# EAGLE board VX2212-REV-B (EAGLE 5.11)
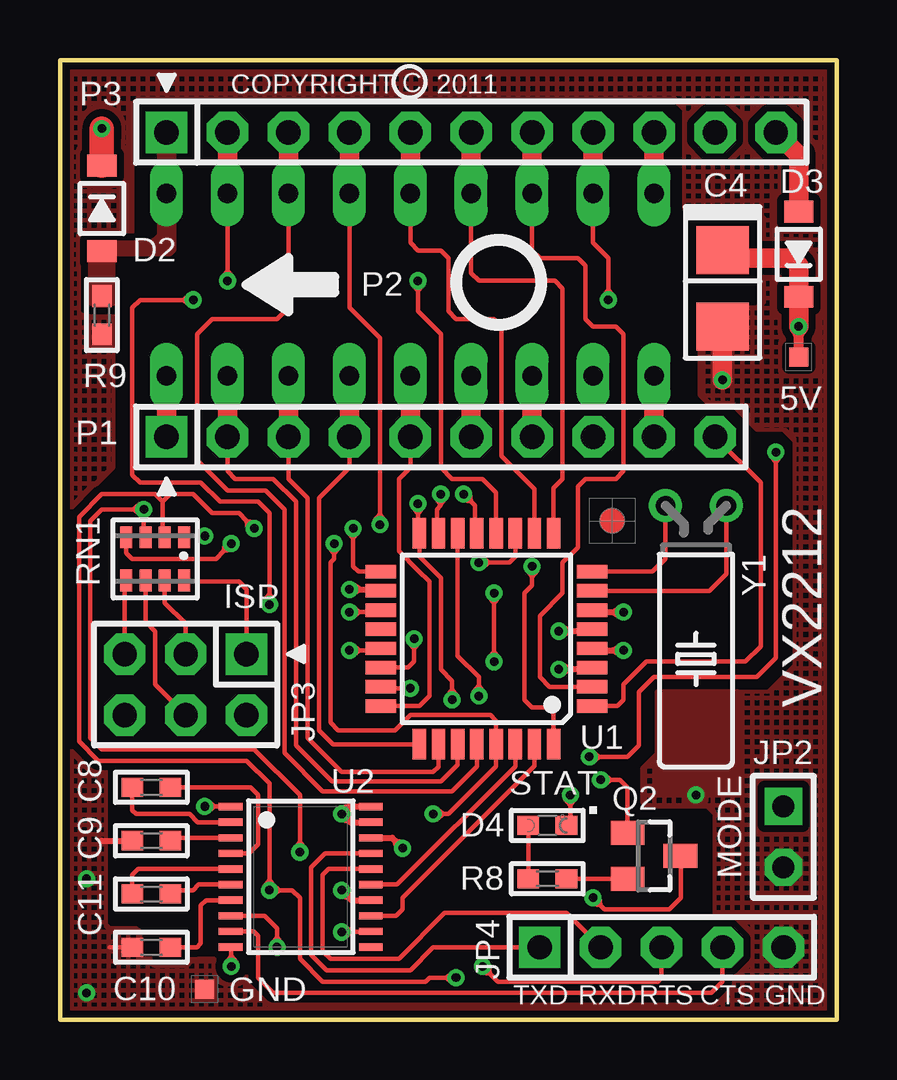
[diagram p0: board, top side]
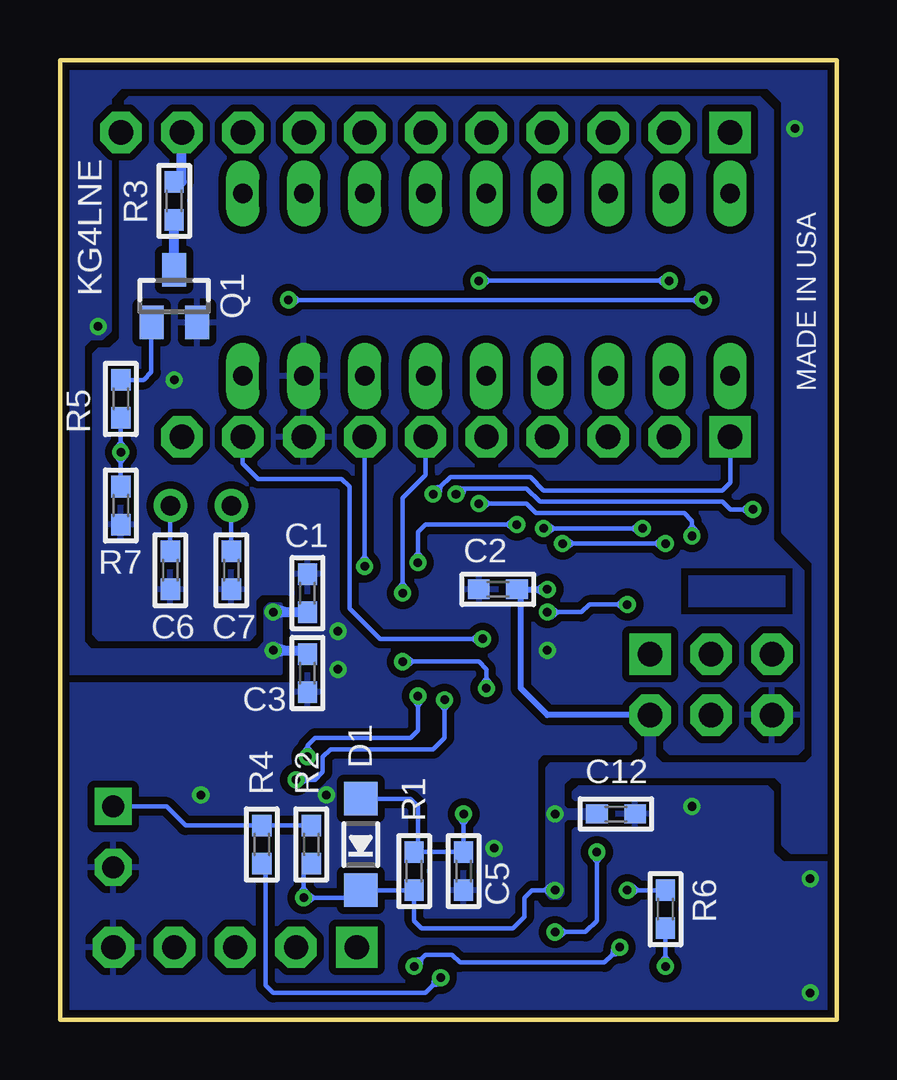
[diagram p1: board, bottom side, seen from below]

Size 32.38 x 40.01 mm. Coordinates in mm from the lower left corner, seen from the top.
Outline: 0,0 32.38,0 32.38,40.01 0,40.01 0,0
Copper layers (1*16): Top 0.035mm / dielectric 1.5mm / Bottom 0.035mm
Design rules "smd-7mil": minimum track width 7mil, minimum drill 12mil, track to track 7mil, track to pad 7mil, pad to pad 7mil, via to via 7mil, smd to smd 7mil, copper to edge 10mil, drill to drill 8mil, minimum pad ring 10mil, minimum via ring 7mil, stop-mask expansion 4mil, vias tented up to drill 24mil, thermal gap 12mil
Net classes: 1 VCC: width 0.178 mm

## Footprints (pad centres in the part's own frame; a part is rotated, then mirrored left to right if it is on the bottom)
SMD-08SN = smd 0.8 x 0.8: TP 0,0
C0603 = smd 0.9 x 0.8: 1 -0.794,0; 2 0.794,0
C3528/T = smd 2 x 2.2: + 1.587,0; - -1.587,0
SOD123 = smd 1.4 x 1.4: A 1.905,0; C -1.905,0
SOD123LF = smd 0.91 x 1.22: A 1.778,0; C -1.778,0
CHIPLED_0603 = smd 0.8 x 0.9: A 0,-0.794; C 0,0.794
JP1 = drill 0.914 square: 1 0,-1.27 | drill 0.914 octagon: 2 0,1.27
AVR-ISP-6 = drill 1.016 square: 1 -2.54,-1.27 | drill 1.016 octagon: 2 -2.54,1.27; 3 0,-1.27; 4 0,1.27; 5 2.54,-1.27; 6 2.54,1.27
1X05 = drill 1.016 square: 1 -5.08,0 | drill 1.016 octagon: 2 -2.54,0; 3 0,0; 4 2.54,0; 5 5.08,0
1X10 = drill 1.016 square: 1 -11.43,0 | drill 1.016 octagon: 2 -8.89,0; 3 -6.35,0; 4 -3.81,0; 5 -1.27,0; 6 1.27,0; 7 3.81,0; 8 6.35,0; 9 8.89,0; 10 11.43,0
DIL18-NS = drill 0.813 long: 1 -10.16,-3.81; 2 -7.62,-3.81; 3 -5.08,-3.81; 4 -2.54,-3.81; 5 0,-3.81; 6 2.54,-3.81; 7 5.08,-3.81; 8 7.62,-3.81; 9 10.16,-3.81; 10 10.16,3.81; 11 7.62,3.81; 12 5.08,3.81; 13 2.54,3.81; 14 0,3.81; 15 -2.54,3.81; 16 -5.08,3.81; 17 -7.62,3.81; 18 -10.16,3.81
1X11 = drill 1.016 square: 1 -12.7,0 | drill 1.016 octagon: 2 -10.16,0; 3 -7.62,0; 4 -5.08,0; 5 -2.54,0; 6 0,0; 7 2.54,0; 8 5.08,0; 9 7.62,0; 10 10.16,0; 11 12.7,0
SOT23-BEC = smd 1 x 1.4: B -0.95,-1.1; C 0,1.1; E 0.95,-1.1
R0603 = smd 0.9 x 0.8: 1 -0.794,0; 2 0.794,0
742-8 = smd 0.5 x 0.9: 1 -1.2,-0.9; 2 -0.4,-0.9; 3 0.4,-0.9; 4 1.2,-0.9; 5 1.2,0.9; 6 0.4,0.9; 7 -0.4,0.9; 8 -1.2,0.9
TQFP32-08 = smd 1.27 x 0.559: 1 -4.4,2.8; 2 -4.4,2; 3 -4.4,1.2; 4 -4.4,0.4; 5 -4.4,-0.4; 6 -4.4,-1.2; 7 -4.4,-2; 8 -4.4,-2.8; 17 4.4,-2.8; 18 4.4,-2; 19 4.4,-1.2; 20 4.4,-0.4; 21 4.4,0.4; 22 4.4,1.2; 23 4.4,2; 24 4.4,2.8 | smd 0.559 x 1.27: 9 -2.8,-4.4; 10 -2,-4.4; 11 -1.2,-4.4; 12 -0.4,-4.4; 13 0.4,-4.4; 14 1.2,-4.4; 15 2,-4.4; 16 2.8,-4.4; 25 2.8,4.4; 26 2,4.4; 27 1.2,4.4; 28 0.4,4.4; 29 -0.4,4.4; 30 -1.2,4.4; 31 -2,4.4; 32 -2.8,4.4
TSSOP20 = smd 0.305 x 0.991: 1 -2.925,-2.918; 2 -2.275,-2.918; 3 -1.625,-2.918; 4 -0.975,-2.918; 5 -0.325,-2.918; 6 0.325,-2.918; 7 0.975,-2.918; 8 1.625,-2.918; 9 2.275,-2.918; 10 2.925,-2.918; 11 2.925,2.918; 12 2.275,2.918; 13 1.625,2.918; 14 0.975,2.918; 15 0.325,2.918; 16 -0.325,2.918; 17 -0.975,2.918; 18 -1.625,2.918; 19 -2.275,2.918; 20 -2.925,2.918
TC39H = drill 0.813 round: 1 -1.27,0; 2 1.27,0

## Placement (x,y rotation side)
5V  TPP-SMD-08SN  [SMD-08SN]  30.8,27.62 90 top
$$U$1  [ICON_PIN1_B]  4.45,38.73 90 top
$$U$2  [ICON_PIN1_B]  4.45,22.54 270 top
$$U$3  [ICON_PIN1_B]  9.53,15.24 0 top
C1  0.1uF  [C0603]  22.07,17.78 270 bottom
C2  0.1uF  [C0603]  14.13,17.94 0 bottom
C3  0.1uF  [C0603]  22.07,14.45 270 bottom
C4  10uF/16V  [C3528/T]  27.62,30.48 90 top
C5  0.1uF  [C0603]  15.56,6.19 90 bottom
C6  22pF  [C0603]  27.78,18.73 90 bottom
C7  22pF  [C0603]  25.24,18.73 90 bottom
C8  0.1uF  [C0603]  3.81,9.68 180 top
C9  0.1uF  [C0603]  3.81,7.46 180 top
C10  0.1uF  [C0603]  3.81,3.02 180 top
C11  0.1uF  [C0603]  3.81,5.24 180 top
C12  0.1uF  [C0603]  9.21,8.57 180 bottom
D1  MMSD4148  [SOD123]  19.84,7.3 90 bottom
D2  MBR140SFT1 (DNP)  [SOD123LF]  1.75,33.81 270 top
D3  MBR140SFT1  [SOD123LF]  30.8,31.91 90 top
D4  0603  [CHIPLED_0603]  20.32,8.1 270 top
FIDUCIAL1  [G10S]  23.02,20.8 0 top
GND  TPP-SMD-08SN  [SMD-08SN]  6.03,1.27 0 top
ICON2  [ICON_ARROW-S]  9.53,30.64 90 top
JP2  [JP1]  30.16,7.62 180 top
JP3  AVR-ISP-6  [AVR-ISP-6]  5.24,13.97 180 top
JP4  [1X05]  25.08,3.02 0 top
P1  [1X10]  15.88,24.29 0 top
P2  [DIL18-NS]  14.61,30.64 0 top
P3  [1X11]  17.14,36.99 0 top
Q1  MMBT3904LT1  [SOT23-BEC]  27.62,30.16 0 bottom
Q2  MMBT3904LT1  [SOT23-BEC]  24.77,6.83 270 top
R1  10k  [R0603]  17.62,6.19 270 bottom
R2  10k  [R0603]  21.91,7.3 90 bottom
R3  47  [R0603]  27.62,34.13 90 bottom
R4  47  [R0603]  23.97,7.3 90 bottom
R5  100  [R0603]  29.84,25.88 270 bottom
R6  47 (DNP)  [R0603]  7.14,4.6 90 bottom
R7  100k  [R0603]  29.84,21.43 90 bottom
R8  470  [R0603]  20.32,5.87 0 top
R9  10k  [R0603]  1.75,29.37 90 top
RN1  47  [742-8]  3.97,19.21 180 top
U1  MEGA8-AI  [TQFP32-08]  17.78,15.88 180 top
U2  MAX3223PW  [TSSOP20]  10.04,5.96 270 top
U$1  [PCBFEAT-COPYRIGHT-032]  7.11,38.61 0 top
U$52  [PCBFEAT-REV-070]  18.29,30.73 0 top
Y1  14.7456 MHZ  [TC39H]  26.51,21.43 180 top

## Library data of the parts
5V GND = testpoint
$$U$1-$$U$3 ICON2 = dicons
C1-C12 R1-R9 = rc-master
D1-D3 = diode
D4 = led
FIDUCIAL1 = dfiducial
JP2 = jumper
JP3 U1 = atmel
JP4 P1 P3 = pinhead
P2 = ic-package
Q1 Q2 = transistor-npn
RN1 = resistor-array
U2 = maxim
U$1 U$52 = dpcb-feature
Y1 = crystal

## Nets
#CS1: P1.7 P2.7 U1.32
#CS2: P1.10 U1.1
#RECALL: P2.10 P3.9
#RESET: C5.2 D1.A R1.1 RN1.4 U1.29
#STORE: P1.9 P2.9 U1.22
#WE: P2.11 P3.8 U1.19
+5V [VCC]: 5V.TP C1.2 C2.2 C3.1 C4.+ C12.2 D1.C D2.C D3.C JP3.2 Q2.C R1.2 R2.1 U1.4 U1.6 U1.18 U2.14 U2.19 U2.20
A0: P1.6 P2.6 U1.23
A1: P1.5 P2.5 U1.24
A2: P1.4 P2.4 U1.25
A3: P1.3 P2.3 U1.26
A4: P1.2 P2.2 U1.27
A5: P2.16 P3.3 U1.28
A6: P2.17 P3.2 U1.12
A7: P1.1 P2.1 U1.13
CTS: R6.1 U2.10
D1: P2.12 P3.7 U1.2
D2: P2.13 P3.6 U1.9
D3: P2.14 P3.5 U1.10
D4: P2.15 P3.4 U1.11
GND: C1.1 C2.1 C3.2 C4.- C5.1 C6.1 C7.1 C9.2 C10.2 C12.1 D4.C GND.TP JP2.2 JP3.6 JP4.5 P1.8 P2.8 Q1.E R7.1 R9.1 U1.3 U1.5 U1.21 U2.1 U2.18
LED: Q2.B RN1.1 U1.16
MODE/CTS: R4.1 R6.2 RN1.2 U1.17
N$1: JP4.1 U2.17
N$2: JP3.1 RN1.8
N$3: C11.2 U2.5
N$4: D4.A R8.1
N$5: JP3.4 RN1.6
N$6: JP3.3 RN1.7
N$7: JP4.3 U2.8
N$8: JP4.2 U2.16
N$9: C8.2 U2.2
N$10: C10.1 U2.7
N$11: C9.1 U2.3
N$12: C8.1 U2.4
N$13: C11.1 U2.6
N$14: P3.10 R3.2
N$15 [VCC]: D2.A P2.18 P3.1 R9.2
N$16: JP4.4 U2.9
N$17: Q2.E R8.2
N$18: Q1.C R3.1
N$20: JP2.1 R2.2 R4.2
N$22: D3.A P3.11
N$23: JP3.5 RN1.5
N$26: Q1.B R5.1
N$30: C7.2 U1.8 Y1.2
N$38: C6.2 U1.7 Y1.1
RRST: R5.2 R7.2 U1.14
RTS: RN1.3 U1.15 U2.12
RXD: U1.30 U2.15
TXD: U1.31 U2.13

## Tracks (layer width: path | path; a pad name or v marks a point on that pad's centre or on a via)
#CS1  (via drill 0.36)
  Top 0.178: 19.68,18.45 19.68,18.1 19.37,17.78 19.37,13.34 19.68,13.02 20.32,13.02 20.58,12.76 U1.32 | 19.68,18.45 v19.68,18.89 | 19.68,18.45 19.9,18.73 v19.68,18.89 | 19.68,18.45 19.47,18.73 v19.68,18.89
  Top 0.813: P1.7 P2.7
  Bottom 0.178: v19.68,18.89 19.68,19.34 | 19.68,19.34 P1.7 | 19.68,19.34 19.47,19.05 v19.68,18.89 | 19.68,19.34 19.9,19.05 v19.68,18.89
#CS2
  Top 0.178: U1.1 23.23,13.07 23.5,13.34 23.5,13.97 24.45,14.92 28.57,14.92 29.21,15.56 29.21,22.38 P1.10
#RECALL
  Top 0.813: P2.10 P3.9
#RESET  (via drill 0.36)
  Top 0.178: 18.18,11.2 U1.29 18.18,12.46 17.94,12.7 14.61,12.7 13.97,12.06 11.59,12.06 11.27,12.38 11.27,14.92 11.27,19.05 11.43,19.21 11.43,19.4 | 18.18,11.2 18.1,11.11 | v11.43,19.84 11.43,19.4 | RN1.4 2.77,19.46 3.02,19.21 6.51,19.21 6.83,19.53 | 6.83,19.53 v7.14,19.84 | 18.18,11.2 18.18,10.56 16.19,8.57 16,8.57 | 16,8.57 v15.56,8.57 | 16,8.57 15.72,8.79 v15.56,8.57 | 16,8.57 15.72,8.36 v15.56,8.57 | 11.43,19.4 11.64,19.68 v11.43,19.84 | 11.43,19.4 11.22,19.68 v11.43,19.84 | 6.83,19.53 7.18,19.58 v7.14,19.84 | 6.83,19.53 6.88,19.88 v7.14,19.84
  Bottom 0.178: v7.14,19.84 7.59,19.84 | 7.59,19.84 10.99,19.84 | 10.99,19.84 v11.43,19.84 | 17.46,6.99 R1.1 17.46,7.3 17.46,8.26 17.46,8.89 17.77,9.2 D1.A | C5.2 17.46,6.99 | 17.46,6.99 | C5.2 | v15.56,8.57 15.56,8.13 | 15.56,8.13 C5.2 | 15.56,8.13 15.77,8.41 v15.56,8.57 | 15.56,8.13 15.34,8.41 v15.56,8.57 | 10.99,19.84 11.27,19.63 v11.43,19.84 | 10.99,19.84 11.27,20.06 v11.43,19.84 | 7.59,19.84 7.3,20.06 v7.14,19.84 | 7.59,19.84 7.3,19.63 v7.14,19.84
#STORE  (via drill 0.36)
  Top 0.178: U1.22 14.52,14.68 14.76,14.92 14.76,15.43 | 14.76,15.43 v14.76,15.88 | 14.76,15.43 14.98,15.71 v14.76,15.88 | 14.76,15.43 14.55,15.71 v14.76,15.88
  Top 0.813: P1.9 P2.9
  Bottom 0.178: v14.76,15.88 15.21,15.88 | 15.21,15.88 19.05,15.88 20.32,17.14 20.32,22.23 20.64,22.54 24.13,22.54 24.77,23.18 P1.9 | 15.21,15.88 14.92,16.09 v14.76,15.88 | 15.21,15.88 14.92,15.66 v14.76,15.88
#WE  (via drill 0.36)
  Top 0.178: v5.56,30 3.33,30 3.02,29.69 3.02,22.7 3.33,22.38 5.87,22.38 6.67,21.59 8.26,21.59 8.73,21.11 v8.73,17.3 | U1.19 13.27,17.07 13.18,16.99 12.51,16.99 | v12.06,16.99 12.22,16.99 12.51,16.99 | P2.11 22.23,32.38 22.86,31.75 22.86,30.45 | v22.86,30 22.86,30.45 | 22.86,30.45 22.65,30.16 v22.86,30 | 22.86,30.45 23.07,30.16 v22.86,30 | v5.56,30 5.4,29.79 5.11,30 5.4,30.22 v5.56,30 | v8.73,17.3 8.52,17.46 8.73,17.75 8.95,17.46 v8.73,17.3 | 12.51,16.99 12.22,17.2 v12.06,16.99 | 12.51,16.99 12.22,16.77 v12.06,16.99
  Top 0.813: P2.11 P3.8
  Bottom 0.178: v5.56,30 6,30 | 6,30 22.41,30 | 22.41,30 v22.86,30 | v8.73,17.3 9.18,17.3 | 9.18,17.3 10.32,17.3 10.64,16.99 11.62,16.99 | 11.62,16.99 v12.06,16.99 | 22.41,30 22.7,29.79 v22.86,30 | 22.41,30 22.7,30.22 v22.86,30 | 6,30 5.72,30.22 v5.56,30 | 6,30 5.72,29.79 v5.56,30 | 9.18,17.3 8.89,17.52 v8.73,17.3 | 9.18,17.3 8.89,17.09 v8.73,17.3 | 11.62,16.99 11.9,16.77 v12.06,16.99 | 11.62,16.99 11.9,17.2 v12.06,16.99
+5V  (via drill 0.36)
  Top 0.178: Q2.C | Q2.C | v22.23,5.08 22.54,4.77 | 22.54,4.77 22.7,4.6 25.4,4.6 25.88,5.08 Q2.C | 22.54,4.77 22.49,5.12 v22.23,5.08 | 22.54,4.77 22.19,4.82 v22.23,5.08
  Top 0.254: U1.18 13.4,17.88 13.49,17.94 12.51,17.94 | v12.06,17.94 12.51,17.94 | 12.06,8.88 12.07,8.88 | 12.07,8.88 U2.20 | 12.06,8.88 12.06,8.89 | 12.06,8.88 | 12.06,8.88 | v11.75,8.57 | v11.75,8.57 12.06,8.89 | v11.75,8.57 | v11.75,8.57 | U2.19 12.09,8.23 12.06,8.26 | v11.75,8.57 12.06,8.26 | v11.75,5.4 | v11.75,5.4 | U2.14 12.16,4.98 v11.75,5.4 | U1.4 22.38,15.4 23.05,15.4 | 23.05,15.4 v23.5,15.4 | U1.6 22.38,16.99 23.05,16.99 | 23.05,16.99 v23.5,16.99 | v11.75,5.4 11.97,5.45 12.06,5.08 11.69,5.18 v11.75,5.4 | 23.05,16.99 23.38,16.79 v23.5,16.99 | 23.05,16.99 23.38,17.18 v23.5,16.99 | 12.51,17.94 12.18,18.14 v12.06,17.94 | 12.51,17.94 12.18,17.74 v12.06,17.94 | 12.07,8.88 11.7,8.8 v11.75,8.57 | 12.07,8.88 11.97,8.52 | 11.97,8.52 11.97,8.51 v11.75,8.57 | 12.06,8.88 11.69,8.79 v11.75,8.57 | 12.06,8.88 11.97,8.52 | 11.97,8.52 | v11.75,8.57 11.97,8.52 | 12.06,8.89 11.69,8.79 v11.75,8.57 | 12.06,8.89 11.97,8.52 | v11.75,8.57 11.97,8.52 | 12.06,8.26 11.97,8.63 v11.75,8.57 | 12.06,8.26 11.69,8.35 v11.75,8.57 | 23.05,15.4 23.38,15.2 v23.5,15.4 | 23.05,15.4 23.38,15.6 v23.5,15.4
  Top 0.406: 5V.TP 30.8,28.45 | 30.8,28.45 v30.8,28.89 | 30.8,28.45 30.94,28.84 v30.8,28.89 | 30.8,28.45 30.65,28.84 v30.8,28.89
  Top 0.813: v30.8,28.89 D3.C 30.8,31.43 30.48,31.75 27.62,31.75 C4.+
  Top 1.016: D2.C 1.75,36.83 v1.75,37.15
  Bottom 0.178: 21.78,5.08 19.84,5.08 D1.C 19.2,5.39 18.89,5.4 18.57,5.4 18.26,5.4 R1.2 17.62,4.13 17.3,3.81 13.49,3.81 13.02,4.29 13.02,5.08 12.7,5.4 12.19,5.4 | 21.78,5.08 v22.23,5.08 | v22.23,5.08 22.23,5.53 | 22.23,5.53 22.23,6.35 22.07,6.51 R2.1 | v11.75,5.4 | v11.75,5.4 | v11.75,5.4 12.19,5.4 | 12.19,5.4 11.91,5.61 v11.75,5.4 | 12.19,5.4 11.91,5.18 v11.75,5.4 | 21.78,5.08 22.07,4.87 v22.23,5.08 | 21.78,5.08 22.07,5.29 v22.23,5.08 | 22.23,5.53 22.01,5.24 v22.23,5.08 | 22.23,5.53 22.44,5.24 v22.23,5.08
  Bottom 0.254: 12.51,17.94 13.18,17.94 13.18,13.81 12.06,12.7 JP3.2 | 12.51,17.94 v12.06,17.94 | 12.51,17.94 12.18,18.14 v12.06,17.94 | 12.51,17.94 12.18,17.74 v12.06,17.94
  Bottom 0.406: v23.5,16.99 23.05,16.99 | 23.05,16.99 C1.2 | 13.49,17.94 C2.2 13.18,17.94 | v23.5,15.4 22.07,15.4 | 22.07,15.4 | 22.07,15.4 C3.1 | v23.5,15.4 | 23.05,16.99 23.44,16.84 v23.5,16.99 | 23.05,16.99 23.44,17.13 v23.5,16.99 | v23.5,15.4 23.44,15.26 23.05,15.4 23.44,15.54 v23.5,15.4
  pour Bottom (isolate 0.305, no thermals): 32.07,14.45 32.07,39.69 0.32,39.69 0.32,6.99 1.75,6.98 1.9,6.98 2.22,7.3 2.22,9.84 2.54,10.16 11.11,10.16 11.43,9.84 11.43,8.89 11.27,8.73 9.68,8.73 9.68,8.41 11.27,8.41 11.43,8.26 11.43,5.56 11.43,5.24 11.59,5.08 11.91,5.08 12.06,5.24 12.06,10.48 11.91,10.64 8.25,10.64 7.94,10.95 7.94,13.18 7.62,13.18 7.62,10.95 7.3,10.64 1.27,10.64 0.95,10.95 0.95,19.05 2.22,20.32 2.22,38.26 2.86,38.89 29.84,38.89 30.32,38.42 30.32,28.73 30.64,28.42 31.11,28.42 31.43,28.1 31.43,20.48 31.43,16.03 31.43,15.72 31.11,15.4 30.8,15.4 25.24,15.4 24.13,15.4 23.81,15.72 23.81,17.14 23.65,17.3 23.18,17.3 23.18,14.45
A0  (via drill 0.36)
  Top 0.178: v18.1,14.92 18.1,15.37 | 18.1,15.37 18.1,17.34 | 18.1,17.34 v18.1,17.78 | 13.38,13.81 13.34,13.81 | U1.23 13.38,13.81 | 13.38,13.81 14.16,13.81 | 14.16,13.81 v14.61,13.81 | 18.1,17.34 18.31,17.62 v18.1,17.78 | 18.1,17.34 17.88,17.62 v18.1,17.78 | 18.1,15.37 17.88,15.08 v18.1,14.92 | 18.1,15.37 18.31,15.08 v18.1,14.92 | 14.16,13.81 14.45,13.6 v14.61,13.81 | 14.16,13.81 14.45,14.03 v14.61,13.81
  Top 0.813: P1.6 P2.6
  Bottom 0.178: v14.61,13.81 14.61,14.13 14.61,14.61 14.92,14.92 17.65,14.92 | 17.65,14.92 v18.1,14.92 | P1.6 17.14,22.7 18.1,21.75 18.1,18.23 | v18.1,17.78 18.1,18.23 | 18.1,18.23 17.88,17.94 v18.1,17.78 | 18.1,18.23 18.31,17.94 v18.1,17.78 | 17.65,14.92 17.94,14.71 v18.1,14.92 | 17.65,14.92 17.94,15.14 v18.1,14.92 | v14.61,13.81 14.39,13.97 14.61,14.26 14.82,13.97 v14.61,13.81
A1
  Top 0.178: P1.5 14.61,23.02 14.13,22.54 14.13,19.53 14.92,18.73 15.4,18.26 15.4,13.49 14.98,13.07 U1.24
  Top 0.813: P1.5 P2.5
A2
  Top 0.178: P1.4 12.06,23.02 10.79,21.75 10.79,12.06 11.38,11.47 U1.25
  Top 0.813: P1.4 P2.4
A3
  Top 0.178: P1.3 9.53,22.54 10.32,21.75 10.32,11.75 11.75,10.32 15.56,10.32 15.78,10.54 U1.26
  Top 0.813: P1.3 P2.3
A4
  Top 0.178: U1.27 16.58,10.63 15.88,9.92 11.35,9.92 9.84,11.43 9.84,21.59 8.89,22.54 7.3,22.54 6.99,22.86 P1.2
  Top 0.813: P1.2 P2.2
A5
  Top 0.178: U1.28 17.38,10.55 16.35,9.53 10.95,9.53 9.37,11.11 9.37,21.27 8.57,22.07 6.99,22.07 5.71,23.34 5.71,28.57 6.35,29.21 9.05,29.21 9.53,29.69 P2.16
  Top 0.813: P2.16 P3.3
A6  (via drill 0.36)
  Top 0.178: U1.12 18.18,21.98 17.62,22.54 16.35,22.54 15.88,23.02 15.88,28.57 14.92,29.53 14.92,30.35 | 14.92,30.35 v14.92,30.8 | v6.99,30.8 6.99,31.24 | 6.99,31.24 P2.17 | 14.92,30.35 15.14,30.64 v14.92,30.8 | 14.92,30.35 14.71,30.64 v14.92,30.8 | 6.99,31.24 6.77,30.96 v6.99,30.8 | 6.99,31.24 7.2,30.96 v6.99,30.8
  Top 0.813: P2.17 P3.2
  Bottom 0.178: v14.92,30.8 14.48,30.8 | 14.48,30.8 7.43,30.8 | 7.43,30.8 v6.99,30.8 | 14.48,30.8 14.76,30.58 v14.92,30.8 | 14.48,30.8 14.76,31.01 v14.92,30.8 | 7.43,30.8 7.14,31.01 v6.99,30.8 | 7.43,30.8 7.14,30.58 v6.99,30.8
A7  (via drill 0.36)
  Top 0.178: U1.13 17.38,20.4 17.3,20.48 17.3,21.43 17.14,21.59 | v16.83,21.91 17.14,21.59 | 17.14,21.59 17.09,21.95 v16.83,21.91 | 17.14,21.59 16.79,21.64 v16.83,21.91
  Top 0.813: P1.1 P2.1
  Bottom 0.178: P1.1 4.45,22.38 4.76,22.07 5.08,22.07 12.22,22.07 12.78,22.62 16.11,22.62 16.51,22.22 | 16.51,22.22 v16.83,21.91 | 16.51,22.22 16.56,21.87 v16.83,21.91 | 16.51,22.22 16.86,22.17 v16.83,21.91
CTS  (via drill 0.36)
  Top 0.178: U2.10 7.14,3.03 v7.14,2.22 | v7.14,2.22 6.93,2.38 7.14,2.67 7.36,2.38 v7.14,2.22
  Bottom 0.178: v7.14,2.22 | v7.14,2.22 7.14,2.67 | 7.14,2.67 R6.1 | 7.14,2.67 6.93,2.38 v7.14,2.22 | 7.14,2.67 7.36,2.38 v7.14,2.22
D1
  Top 0.178: U1.2 20.41,13.88 20,14.29 20,16.83 20.95,17.78 20.95,19.05 21.59,19.68 21.59,22.23 21.91,22.54 23.18,22.54 23.5,22.86 23.5,28.57 23.18,28.89 22.23,28.89 21.91,29.21 21.91,31.43 21.59,31.75 20,31.75 19.68,32.07 P2.12
  Top 0.813: P2.12 P3.7
D2
  Top 0.178: U1.9 20.58,22.17 20.95,22.54 20.95,30.48 20.64,30.8 17.46,30.8 17.14,31.11 P2.13
  Top 0.813: P2.13 P3.6
D3
  Top 0.178: P2.14 14.61,32.38 14.92,32.07 15.88,32.07 16.19,31.75 16.19,29.53 16.51,29.21 18.1,29.21 18.41,28.89 18.41,23.5 19.78,22.13 U1.10
  Top 0.813: P2.14 P3.5
D4  (via drill 0.36)
  Top 0.178: P2.15 12.06,29.69 13.34,28.42 13.34,21.08 | v13.34,20.64 13.34,21.08 | U1.11 18.98,19.3 18.73,19.05 17.91,19.05 | v17.46,19.05 17.91,19.05 | 13.34,21.08 13.12,20.8 v13.34,20.64 | 13.34,21.08 13.55,20.8 v13.34,20.64 | 17.91,19.05 17.62,19.26 v17.46,19.05 | 17.91,19.05 17.62,18.84 v17.46,19.05
  Top 0.813: P2.15 P3.4
  Bottom 0.178: 13.78,20.64 17.14,20.64 17.46,20.32 17.46,19.5 | 13.78,20.64 v13.34,20.64 | v17.46,19.05 17.46,19.5 | 13.78,20.64 13.49,20.85 v13.34,20.64 | 13.78,20.64 13.49,20.42 v13.34,20.64 | 17.46,19.5 17.25,19.21 v17.46,19.05 | 17.46,19.5 17.68,19.21 v17.46,19.05
GND  (via drill 0.36)
  Top 0.178: U2.1 7.13,8.88 7.14,8.89 6.48,8.89 | 6.48,8.89 v6.03,8.89 | 2.06,3.02 C10.2 | v27.62,26.67 | v27.62,26.67 | D4.C 21.27,8.26 v21.27,9.37 | v12.06,15.4 | v12.06,15.4 | U1.21 13.38,15.4 12.51,15.4 | v12.06,15.4 12.51,15.4 | 6.48,8.89 6.19,9.1 v6.03,8.89 | 6.48,8.89 6.19,8.68 v6.03,8.89 | 12.51,15.4 12.22,15.61 v12.06,15.4 | 12.51,15.4 12.22,15.19 v12.06,15.4 | v21.27,9.37 21.49,9.21 21.27,8.92 21.06,9.21 v21.27,9.37
  Top 0.254: U1.3 21.98,14.68 21.91,14.61 21.24,14.61 | 21.24,14.61 v20.8,14.61 | U1.5 21.75,16.19 21.24,16.19 | 21.24,16.19 v20.8,16.19 | U2.18 13.85,7.58 13.97,7.46 | 13.97,7.46 v14.29,7.14 | 1.75,7.46 C9.2 | 21.24,14.61 20.91,14.8 v20.8,14.61 | 21.24,14.61 20.91,14.41 v20.8,14.61 | 21.24,16.19 20.91,16.39 v20.8,16.19 | 21.24,16.19 20.91,16 v20.8,16.19 | 13.97,7.46 14.07,7.09 v14.29,7.14 | 13.97,7.46 14.34,7.37 v14.29,7.14
  Top 0.813: v27.62,26.67 C4.-
  other vias: 1.11,5.87 1.11,1.11 26.51,9.37
  pour Bottom (isolate 0.305, rank 6): 0.32,39.69 32.07,39.69 32.07,34.45 32.07,0.32 0.32,0.32
  pour Top (isolate 0.305, rank 2, no thermals, hatched): 0.32,10.32 0.32,11.27 0.32,11.27 0.64,11.27 1.43,10.48 1.91,10.48 1.91,3.97 2.06,3.81 3.17,3.81 3.33,3.65 3.33,2.54 7.94,2.54 7.94,1.75 8.73,0.95 27.31,0.95 28.1,1.75 28.1,3.17 27.3,4.29 27.31,8.57 26.99,8.89 24.45,8.89 24.29,9.05 24.29,10.48 24.92,11.11 24.92,13.65 29.53,13.65 30.64,14.76 30.64,24.13 30.16,24.61 29.05,24.61 27.94,25.72 26.99,25.72 26.67,26.04 26.67,29.69 29.05,29.69 29.37,30 29.37,33.34 29.05,33.66 26.19,33.66 26.03,33.81 26.04,37.62 26.04,37.94 25.56,38.42 3.33,38.42 3.02,38.1 3.02,32.7 2.22,31.91 2.22,23.02 0.48,21.27 0.32,21.27 0.32,39.69 31.91,39.69 32.07,39.53 32.07,0.32 0.32,0.32
  pour Top: 24.92,13.65 28.1,13.65 28.1,9.37 26.75,9.37 26.75,9.13 26.11,9.13 26.11,9.37 24.92,9.37
  pour Top: 24.92,13.65 28.1,13.65 28.1,9.37 26.75,9.37 26.75,9.13 26.11,9.13 26.11,9.37 24.92,9.37
  pour Top: 25.08,13.65 28.26,13.65 28.26,9.37 26.91,9.37 26.91,9.13 26.27,9.13 26.27,9.37 25.08,9.37
LED  (via drill 0.36)
  Top 0.178: v14.92,21.51 14.92,21.07 | 14.92,21.07 14.92,20.32 U1.16 14.98,19.31 15.88,18.41 15.88,14.61 16.35,14.13 16.35,13.78 | RN1.1 5.17,20.16 5.59,20.16 | 5.59,20.16 v6.03,20.16 | Q2.B 23.66,9.67 23.34,10 22.99,10 | v22.54,10 22.99,10 | 16.35,13.78 v16.35,13.34 | 14.92,21.07 15.14,21.35 v14.92,21.51 | 14.92,21.07 14.71,21.35 v14.92,21.51 | 5.59,20.16 5.87,19.95 v6.03,20.16 | 5.59,20.16 5.87,20.38 v6.03,20.16 | 16.35,13.78 16.14,13.49 v16.35,13.34 | 16.35,13.78 16.57,13.49 v16.35,13.34 | 22.99,10 22.7,10.21 v22.54,10 | 22.99,10 22.7,9.79 v22.54,10
  Bottom 0.178: v6.03,20.16 6.03,20.61 | 6.03,20.61 6.03,20.8 6.35,21.11 12.54,21.11 12.94,21.51 v14.92,21.51 | v16.35,13.34 16.35,12.89 | 16.35,12.89 16.35,11.75 16.83,11.27 21.11,11.27 21.43,10.95 21.43,10.32 21.75,10 22.1,10 | 22.1,10 v22.54,10 | v14.92,21.51 14.76,21.3 14.48,21.51 14.76,21.72 v14.92,21.51 | 6.03,20.61 5.82,20.32 v6.03,20.16 | 6.03,20.61 6.25,20.32 v6.03,20.16 | 16.35,12.89 16.57,13.18 v16.35,13.34 | 16.35,12.89 16.14,13.18 v16.35,13.34 | 22.1,10 22.38,9.79 v22.54,10 | 22.1,10 22.38,10.21 v22.54,10
MODE/CTS  (via drill 0.36)
  Top 0.178: 13.38,18.73 U1.17 12.44,18.68 12.22,18.89 12.22,20.03 | v12.22,20.48 12.22,20.03 | 4.36,20.08 4.29,20 4.37,20.16 RN1.2 4.29,20.11 4.29,21.59 | v8.73,5.4 8.73,5.84 | 8.73,5.84 8.73,9.84 7.78,10.79 1.59,10.79 0.79,11.59 0.79,20.95 1.75,21.91 3.97,21.91 4.29,21.59 | 7.78,20.79 7.46,21.11 6.35,21.11 5.56,21.91 4.6,21.91 4.29,21.59 | 7.78,20.79 v8.1,20.48 | v8.1,20.48 | v8.73,5.4 9.18,5.4 | 9.18,5.4 9.68,5.4 10,5.08 10,2.54 10.95,1.59 15.24,1.59 15.4,1.75 16.07,1.75 | 16.07,1.75 v16.51,1.75 | 8.73,5.84 8.52,5.56 v8.73,5.4 | 8.73,5.84 8.95,5.56 v8.73,5.4 | 9.18,5.4 8.89,5.61 v8.73,5.4 | 9.18,5.4 8.89,5.18 v8.73,5.4 | 12.22,20.03 12.44,20.32 v12.22,20.48 | 12.22,20.03 12.01,20.32 v12.22,20.48 | 7.78,20.79 7.83,20.44 v8.1,20.48 | 7.78,20.79 8.13,20.74 v8.1,20.48 | 16.07,1.75 16.35,1.53 v16.51,1.75 | 16.07,1.75 16.35,1.96 v16.51,1.75
  Bottom 0.178: v8.1,20.48 8.54,20.48 | 8.54,20.48 11.78,20.48 | 11.78,20.48 v12.22,20.48 | R4.1 23.81,6.35 23.81,1.43 23.5,1.11 17.14,1.11 16.82,1.43 | R4.1 | v16.51,1.75 | v16.51,1.75 16.82,1.43 | R6.2 8.29,5.4 | 8.29,5.4 v8.73,5.4 | 8.29,5.4 8.57,5.18 v8.73,5.4 | 8.29,5.4 8.57,5.61 v8.73,5.4 | 11.78,20.48 12.06,20.27 v12.22,20.48 | 11.78,20.48 12.06,20.69 v12.22,20.48 | 8.54,20.48 8.26,20.69 v8.1,20.48 | 8.54,20.48 8.26,20.27 v8.1,20.48 | 16.82,1.43 16.77,1.78 v16.51,1.75 | 16.82,1.43 16.47,1.48 v16.51,1.75
N$1
  Top 0.178: U2.17 11.06,6.93 10.48,6.35 10.48,2.7 11.11,2.06 14.61,2.06 15.56,3.02 JP4.1
N$2
  Top 0.178: JP3.1 7.78,17.94 7.46,18.26 5.24,18.26 5.24,18.31 RN1.8
N$3
  Top 0.178: U2.5 3.27,6.28 3.02,6.03 C11.2 | C11.2
N$4
  Top 0.178: 19.53,6.19 D4.A
  Top 0.254: R8.1 19.53,6.19
N$5
  Top 0.178: RN1.6 3.57,16.59 3.97,16.19 3.97,13.97 JP3.4
N$6
  Top 0.178: RN1.7 4.37,17.38 5.24,16.51 JP3.3
N$7  (via drill 0.36)
  Top 0.178: JP4.3 25.08,1.75 24.92,1.59 18.26,1.59 17.94,1.91 | v17.62,2.22 17.94,1.91 | U2.8 8.53,4.33 9.05,3.81 9.05,3.46 | 9.05,3.46 v9.05,3.02 | 17.94,1.91 17.89,2.26 v17.62,2.22 | 17.94,1.91 17.58,1.96 v17.62,2.22 | 9.05,3.46 8.84,3.18 v9.05,3.02 | 9.05,3.46 9.26,3.18 v9.05,3.02
  Bottom 0.178: v9.05,3.02 9.36,2.7 | 9.36,2.7 9.68,2.38 15.72,2.38 16.03,2.7 17.14,2.7 17.31,2.54 | 17.31,2.54 17.46,2.38 v17.62,2.22 | 17.31,2.54 17.36,2.19 v17.62,2.22 | 17.31,2.54 17.66,2.49 v17.62,2.22 | 9.36,2.7 9.31,3.05 v9.05,3.02 | 9.36,2.7 9.01,2.75 v9.05,3.02
N$8
  Top 0.178: U2.16 11.2,6.28 10.95,6.03 10.95,2.86 11.27,2.54 14.13,2.54 16.03,4.45 21.11,4.45 JP4.2
N$9
  Top 0.178: U2.2 5.74,8.23 5.4,8.57 4.92,8.57 3.17,8.57 3.02,8.73 3.02,9.53 | 3.02,9.53 | C8.2 3.02,9.53
N$10
  Top 0.178: U2.7 6.09,4.98 5.87,4.76 5.87,3.17 5.71,3.02 C10.1
N$11
  Top 0.178: C9.1 | C9.1 4.76,7.46 4.88,7.58 U2.3
N$12
  Top 0.178: U2.4 7.88,6.93 8.26,7.3 8.26,9.37 7.94,9.68 C8.1 | C8.1
N$13
  Top 0.178: C11.1 4.6,5.4 5.56,5.4 5.79,5.63 U2.6
N$14
  Bottom 0.406: R3.2 27.3,34.92 P3.10
N$15
  Top 0.406: P2.18 4.45,34.29 4.28,34.45
  pour Top (no thermals): 4.13,37.47 4.13,32.7 3.81,32.39 1.27,32.39 1.27,29.85 2.22,29.85 2.22,31.91 4.6,31.91 4.76,32.07 4.76,37.47
N$16
  Top 0.178: JP4.4 27.62,1.59 27.15,1.11 8.89,1.11 8.26,1.75 8.26,3.49 8.07,3.68 U2.9
N$17
  Top 0.178: R8.2 | R8.2 | Q2.E R8.2
N$18
  Bottom 0.406: Q1.C R3.1
N$20
  Bottom 0.178: R2.2 R4.2 | R4.2 | R4.2 27.15,8.1 27.94,8.89 JP2.1
N$22
  Top 0.813: P3.11 30.8,36.04 D3.A
N$23
  Top 0.178: RN1.5 2.7,18.31 JP3.5
N$26
  Bottom 0.178: Q1.B 28.57,26.99 28.89,26.67 R5.1 | R5.1
N$30
  Top 0.178: U1.8 24.71,18.68 25.24,19.21 Y1.2 | Y1.2 | Y1.2
  Bottom 0.178: Y1.2 | Y1.2 | C7.2 | Y1.2 C7.2
N$38
  Top 0.178: U1.7 27.08,17.88 27.78,18.57 Y1.1 | Y1.1 | Y1.1
  Bottom 0.178: Y1.1 | Y1.1 | Y1.1 C6.2
N$65
  pour Bottom (no thermals): 2.14,18.49 6.19,18.49 6.19,17.22 2.14,17.22
RRST  (via drill 0.36)
  Top 0.178: 29.84,23.21 29.84,15.08 29.05,14.29 25.08,14.29 24.77,14.29 24.13,13.65 24.13,11.43 23.65,10.95 22.51,10.95 | 29.84,23.21 v29.84,23.65 | v22.07,10.95 22.51,10.95 | U1.14 16.58,15.17 17.46,14.29 17.46,13.94 | v17.46,13.49 17.46,13.94 | 17.46,13.94 17.25,13.65 v17.46,13.49 | 17.46,13.94 17.68,13.65 v17.46,13.49 | 29.84,23.21 30.06,23.49 v29.84,23.65 | 29.84,23.21 29.63,23.49 v29.84,23.65 | 22.51,10.95 22.23,11.17 v22.07,10.95 | 22.51,10.95 22.23,10.74 v22.07,10.95
  Bottom 0.178: v29.84,23.65 29.84,24.1 | 29.84,24.1 R5.2 | v29.84,23.65 29.84,23.21 | 29.84,23.21 R7.2 | 22.07,11.4 22.07,11.43 21.75,11.75 17.78,11.75 17.46,12.06 17.46,13.05 | 22.07,11.4 v22.07,10.95 | 17.46,13.05 v17.46,13.49 | 17.46,13.05 17.68,13.33 v17.46,13.49 | 17.46,13.05 17.25,13.33 v17.46,13.49 | 29.84,24.1 29.63,23.81 v29.84,23.65 | 29.84,24.1 30.06,23.81 v29.84,23.65 | 29.84,23.21 30.06,23.49 v29.84,23.65 | 29.84,23.21 29.63,23.49 v29.84,23.65 | 22.07,11.4 21.85,11.11 v22.07,10.95 | 22.07,11.4 22.28,11.11 v22.07,10.95
RTS  (via drill 0.36)
  Top 0.178: 15.72,20.32 15.72,20.27 U1.15 | v15.88,21.91 15.88,21.46 | 15.88,21.46 15.88,21.43 15.72,21.27 15.72,20.32 | 15.72,20.32 | U2.12 12.73,3.68 12.7,3.65 12.19,3.65 | v11.75,3.65 12.19,3.65 | 10,7.43 10,9.37 8.1,11.27 1.75,11.27 1.27,11.75 1.27,20.8 1.75,21.27 3.05,21.27 | 10,7.43 v10,6.99 | RN1.3 3.49,20.11 3.49,20.83 | v3.49,21.27 3.49,20.83 | v3.49,21.27 3.05,21.27 | 15.88,21.46 16.09,21.75 v15.88,21.91 | 15.88,21.46 15.66,21.75 v15.88,21.91 | 3.49,20.83 3.71,21.11 v3.49,21.27 | 3.49,20.83 3.28,21.11 v3.49,21.27 | 3.05,21.27 3.33,21.06 v3.49,21.27 | 3.05,21.27 3.33,21.49 v3.49,21.27 | 12.19,3.65 11.91,3.87 v11.75,3.65 | 12.19,3.65 11.91,3.44 v11.75,3.65 | 10,7.43 9.79,7.14 v10,6.99 | 10,7.43 10.21,7.14 v10,6.99
  Bottom 0.178: v3.49,21.27 3.94,21.27 | 3.94,21.27 4.45,21.27 | 4.45,21.27 4.76,21.59 12.38,21.59 12.94,22.15 15.64,22.15 v15.88,21.91 | 4.45,21.27 | 11.3,3.65 10.48,3.65 10,4.13 10,6.54 | 11.3,3.65 v11.75,3.65 | v10,6.99 10,6.54 | v15.88,21.91 15.63,21.81 15.5,22.15 15.85,22.17 v15.88,21.91 | 3.94,21.27 3.65,21.49 v3.49,21.27 | 3.94,21.27 3.65,21.06 v3.49,21.27 | 11.3,3.65 11.59,3.44 v11.75,3.65 | 11.3,3.65 11.59,3.87 v11.75,3.65 | 10,6.54 10.21,6.83 v10,6.99 | 10,6.54 9.79,6.83 v10,6.99
RXD
  Top 0.178: U1.30 18.98,10.57 14.04,5.63 U2.15
TXD
  Top 0.178: U1.31 19.78,10.57 14.29,5.08 14.29,4.6 14.02,4.33 U2.13

## Text on the board
tPlace: ISP | VX2212 | STAT | MODE | TXD | RXD | RTS | CTS | GND
bPlace: KG4LNE | MADE IN USA